# Altium PCB converter.PcbDoc (part 1 of 2)
Units mm, origin at the board's own origin, x right, y up, seen from the top; angles counter-clockwise.
Board outline 152.4 x 101.6 mm, 2 copper layers (Top Layer, Bottom Layer); 107 components, 95 nets, 363 pads, 0 vias.
Unrouted connection lines stored in the file: 249.
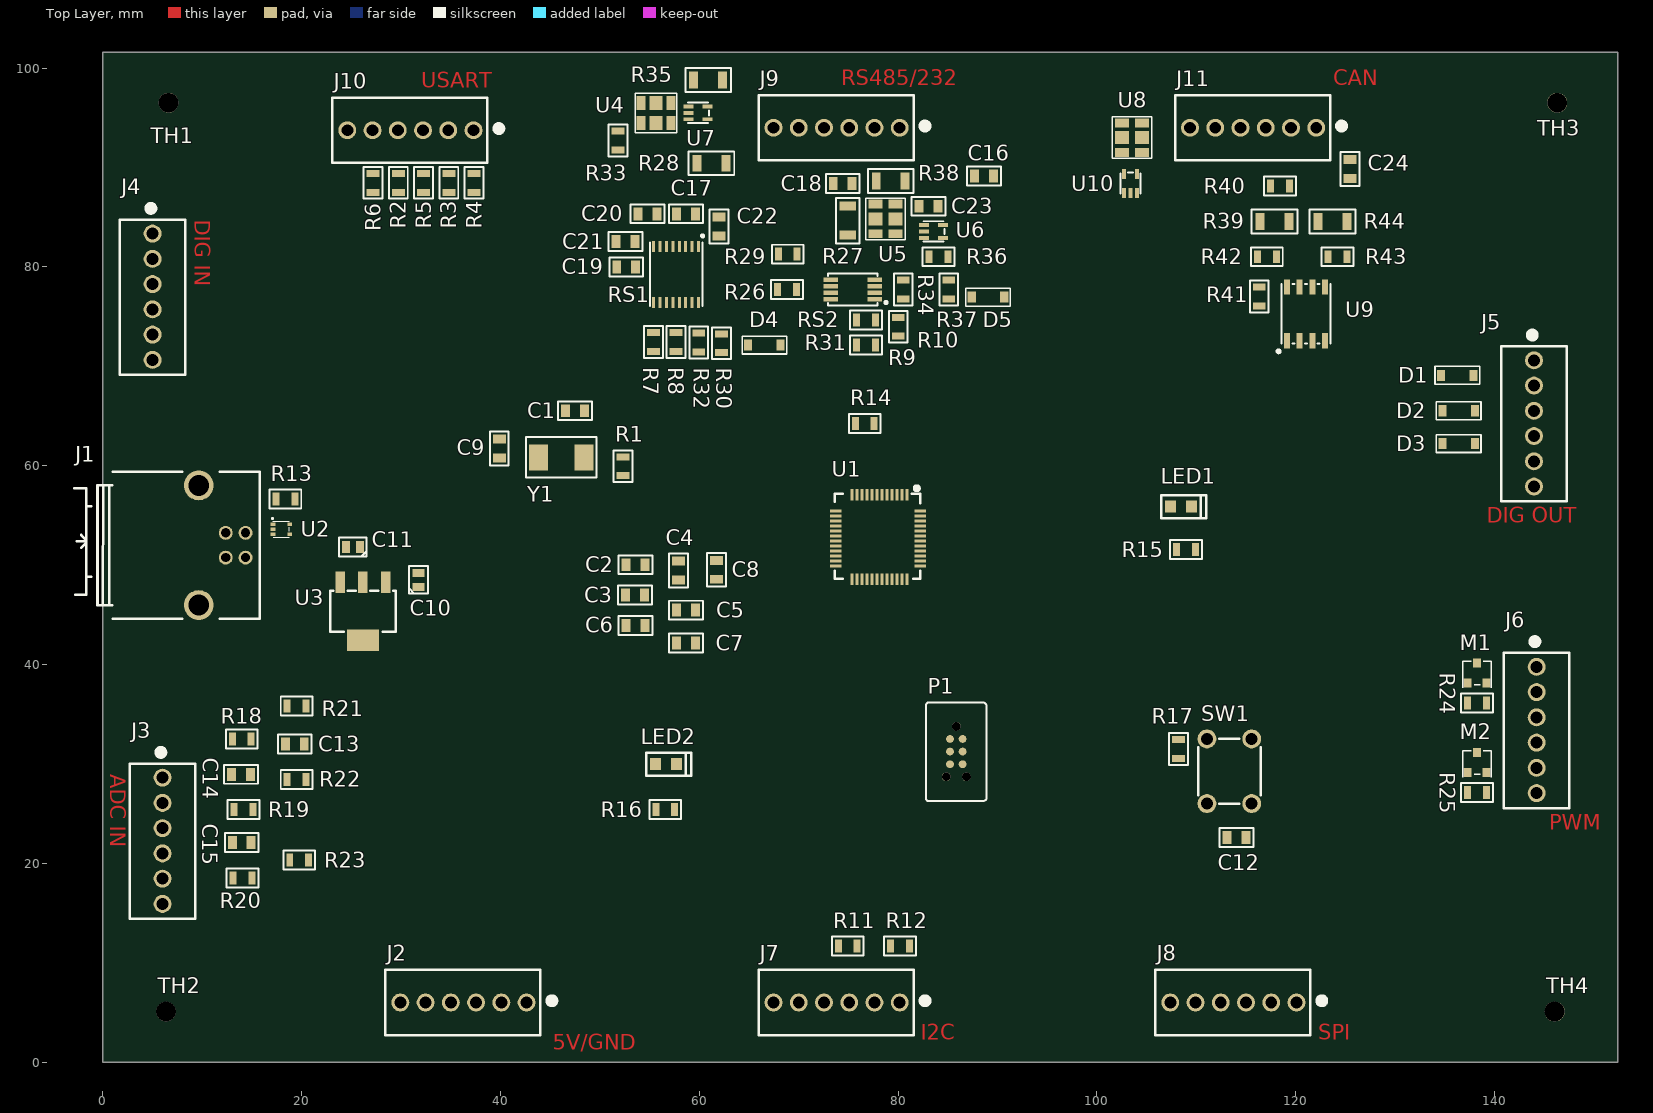
[diagram p0: Top Layer view]
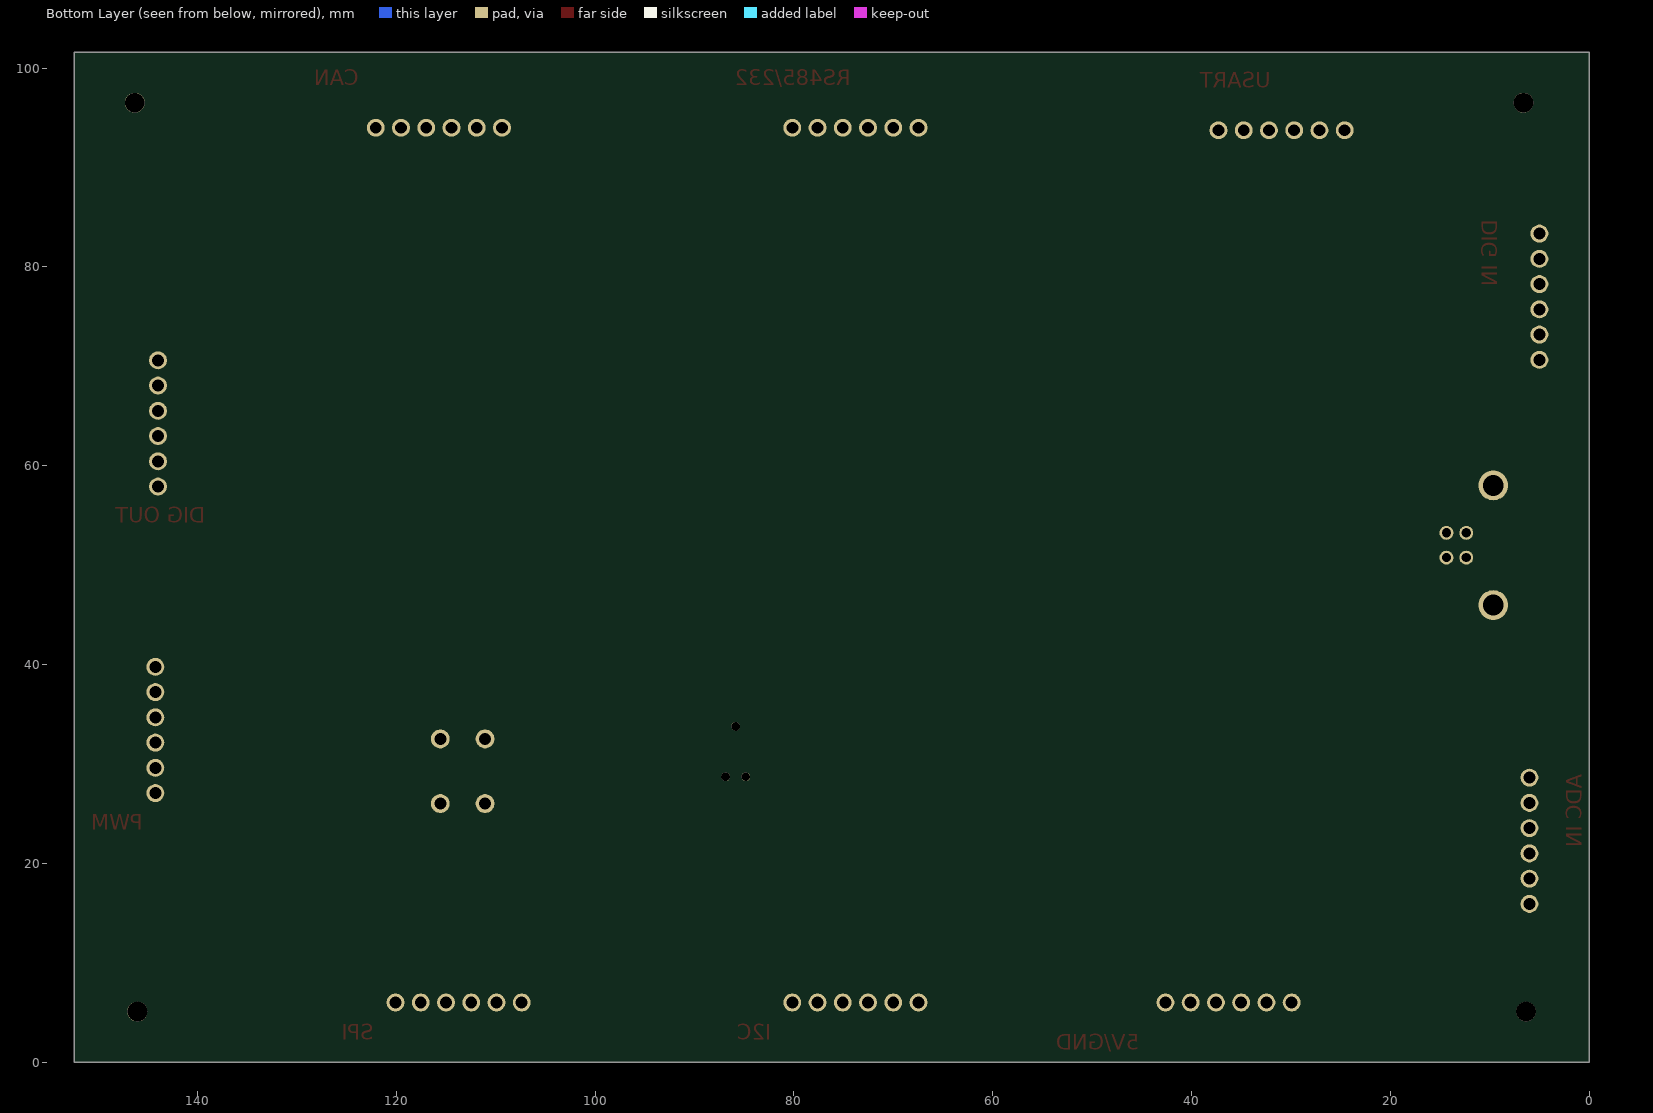
[diagram p1: Bottom Layer view, seen from below]

## Layer stack, top to bottom
Top Solder: solder mask 0.0102, Solder Resist, Dk 3.5
Top Layer: signal copper 0.0356
Dielectric 1: dielectric 0.32, FR-4, Dk 4.8
Bottom Layer: signal copper 0.0356
Bottom Solder: solder mask 0.0102, Solder Resist, Dk 3.5

## Board outline
0,0 152.4,0 152.4,101.6 0,101.6

## Design rules (kind name [scope] priority, off if disabled: settings)
Clearance [All] p1: gap=0.254 ignorepadtopadclearanceinfootprint=FALSE except(0: Arc-Hole Track-Hole SMDPad-Hole THPad-Hole Via-Hole Fill-Hole Poly-Hole Region-Hole Text-Hole)
DiffPairsRouting [All] p1: maxlimit=0.254 minlimit=0.254 mostfreqgap=0.254 toplayer_minwidth=0.381 toplayer_maxwidth=0.381 toplayer_prefwidth=0.381 bottomlayer_minwidth=0.381 bottomlayer_maxwidth=0.381 bottomlayer_prefwidth=0.381 maxuncoupledlength=12.7
PolygonConnect [All] p1: connectstyle=Relief reliefconductorwidth=0.254 reliefentries=4 polygonreliefangle="90 Angle" airgapwidth=0.254
RoutingVias [All] p1: holewidth=0.711 width=1.27 viastyle="Through Hole" minholewidth=0.711 minwidth=1.27 maxholewidth=0.711 maxwidth=1.27
SolderMaskExpansion [All] p1: expansion=0.102 istentingtop=FALSE
Width [All] p1: maxlimit=0.254 minlimit=0.254 preferedwidth=0.254
29 further rules are at their usual default settings.

## Classes and differential pairs
differential pair class USB_D_LINES: USB_D
differential pair class RS485_TVS_LINES: RS485 RS485_TVS UART485
differential pair class RS485_LINES: RS485 RS485_TVS UART485
differential pair class CAN_TVS_LINES: CAN CAN_TVS
differential pair class CAN_LINES: CAN CAN_TVS
net class USB: USB_D_N USB_D_P
net class RS485: RS485_N RS485_P RS485_TVS_N RS485_TVS_P UART485_N UART485_P
net class CAN: CAN_N CAN_P CAN_TVS_N CAN_TVS_P
differential pair USB_D: +USB_D_P -USB_D_N
differential pair UART485: +UART485_P -UART485_N
differential pair RS485: +RS485_P -RS485_N
differential pair RS485_TVS: +RS485_TVS_P -RS485_TVS_N
differential pair CAN: +CAN_P -CAN_N
differential pair CAN_TVS: +CAN_TVS_P -CAN_TVS_N

## Components (designator, comment, footprint, x,y, rotation, side; value= is the part's Value field where it differs from the comment)
C1 "20 pF / 10V" C0805 47.498,65.532 r180 top
C2 "1uF / 10V" C0805 53.594,50.038 r180 top
C3 "10 nF / 50V" C0805 53.528,46.99 r180 top
C4 "0.1uF / 25V" C0805 57.912,49.464 r90 top
C5 "0.1uF / 25V" C0805 58.674,45.466 r0 top
C6 "0.1uF / 25V" C0805 53.594,43.942 r180 top
C7 "0.1uF / 25V" C0805 58.674,42.164 r180 top
C8 "4.7uF / 16V" C0805 61.722,49.53 r90 top
C9 "20 pF / 10V" C0805 39.878,61.722 r90 top
C10 "10uF / 16V" CT0805 31.75,48.514 r90 top
C11 "10uF / 16V" CT0805 25.146,51.816 r180 top
C12 "0.1uF / 25V" C0805 114.046,22.606 r180 top
C13 "10 nF / 50V" C0805 19.304,32.004 r180 top
C14 "10 nF / 50V" C0805 13.904,28.956 r0 top
C15 "10 nF / 50V" C0805 13.97,22.098 r0 top
C16 "0.1uF / 25V" C0805 88.646,89.154 r0 top
C17 "0.1uF / 25V" C0805 58.674,85.344 r0 top
C18 "2.2nF / 250V" C0805 74.422,88.392 r0 top
C19 "0.1uF / 25V" C0805 52.644,80.01 r180 top
C20 "0.1uF / 25V" C0805 54.798,85.344 r0 top
C21 "0.1uF / 25V" C0805 52.578,82.55 r180 top
C22 "0.1uF / 25V" C0805 61.976,84.074 r90 top
C23 "2.2nF / 250V" C0805 83.058,86.106 r0 top
C24 "0.1uF / 25V" C0805 125.476,89.85 r90 top
D1 "BAT54GWJ" SOD123 136.255,69.088 r180 top
D2 "BAT54GWJ" SOD123 136.398,65.532 r180 top
D3 "BAT54GWJ" SOD123 136.398,62.23 r180 top
D4 "BAT54GWJ" SOD123 66.548,72.136 r180 top
D5 "BAT54GWJ" SOD123 89.043,76.962 r180 top
J1 "UE27BC54130" UE27BC54130 12,52 r270 top
J2 "SCREW" SCREW-6P 36.27,6 r180 top
J3 "SCREW" SCREW-6P 6,22.27 r270 top
J4 "SCREW" SCREW-6P 5,77 r270 top
J5 "SCREW" SCREW-6P 143.968,64.254 r270 top
J6 "SCREW" SCREW-6P 144.238,33.414 r270 top
J7 "SCREW" SCREW-6P 73.81,6 r180 top
J8 "SCREW" SCREW-6P 113.73,6 r180 top
J9 "SCREW" SCREW-6P 73.81,94 r180 top
J10 "SCREW" SCREW-6P 30.936,93.746 r180 top
J11 "SCREW" SCREW-6P 115.714,94 r180 top
LED1 "GREEN" LED_0805 108.458,55.88 r180 top
LED2 "GREEN" LED_0805 56.642,29.972 r180 top
M1 "DMG2302UK-7" SOT23 138.238,39.144 r0 top
M2 "DMG2302UK-7" SOT23 138.238,30.144 r0 top
P1 "TC2030-CTX-NL" TC2030-CTX-NL 85.852,31.242 r270 top
R1 "1k" R0805 52.324,59.944 r90 top
R2 "22R" R0805 29.718,88.458 r90 top
R3 "22R" R0805 34.798,88.458 r90 top
R4 "22R" R0805 37.338,88.458 r90 top
R5 "22R" R0805 32.258,88.458 r270 top
R6 "22R" R0805 27.178,88.458 r270 top
R7 "22R" R0805 55.372,72.456 r90 top
R8 "22R" R0805 57.658,72.456 r90 top
R9 "22R" R0805 76.774,72.136 r180 top
R10 "22R" R0805 80.01,73.98 r270 top
R11 "4K7" R0805 74.93,11.684 r0 top
R12 "4K7" R0805 80.198,11.684 r180 top
R13 "1K5" R0805 18.354,56.642 r180 top
R14 "10K" R0805 76.642,64.262 r0 top
R15 "120R" R0805 108.966,51.562 r180 top
R16 "180R" R0805 56.576,25.4 r180 top
R17 "10K" R0805 108.204,31.496 r270 top
R18 "1M" R0805 13.97,32.512 r180 top
R19 "1M" R0805 14.158,25.4 r180 top
R20 "1M" R0805 14.036,18.542 r180 top
R21 "100K" R0805 19.492,35.814 r180 top
R22 "100K" R0805 19.492,28.448 r180 top
R23 "100K" R0805 19.746,20.32 r180 top
R24 "1k" R0805 138.238,36.144 r0 top
R25 "1k" R0805 138.238,27.144 r0 top
R26 "4K7" R0805 68.834,77.724 r180 top
R27 "0R" R1206 74.93,84.656 r270 top
R28 "0R" R1206 61.214,90.424 r180 top
R29 "330R" R0805 68.9,81.28 r180 top
R30 "10K" R0805 62.23,72.324 r270 top
R31 "10K" R0805 76.774,74.676 r180 top
R32 "330R" R0805 59.944,72.39 r270 top
R33 "330R" R0805 51.816,92.71 r90 top
R34 "10K" R0805 80.518,77.724 r90 top
R35 "0R" R1206 60.886,98.806 r180 top
R36 "330R" R0805 84.074,81.026 r180 top
R37 "4K7" R0805 85.09,77.724 r90 top
R38 "0R" R1206 79.248,88.646 r180 top
R39 "0R" R1206 117.856,84.582 r0 top
R40 "120R" R0805 118.43,88.138 r180 top
R41 "10K" R0805 116.332,77.028 r90 top
R42 "33R" R0805 117.094,81.026 r180 top
R43 "33R" R0805 124.206,81.026 r0 top
R44 "0R" R1206 123.698,84.582 r180 top
RS1 "ICL3221EIVZ-T" ICL3221E 57.658,79.248 r270 top
RS2 "SN65HVD72DGKR" RS485T 75.438,77.724 r180 top
SW1 "PTS645SH50SMTR92LFS" PTS645SH50SMTR92-LFS 113.32,29.262 r270 top
TH1 "Tooling Hole" "TOOLING HOLE" 6.604,96.52 r0 top
TH2 "Tooling Hole" "TOOLING HOLE" 6.35,5.08 r0 top
TH3 "Tooling Hole" "TOOLING HOLE" 146.304,96.52 r0 top
TH4 "Tooling Hole" "TOOLING HOLE" 146.05,5.08 r0 top
U1 "STM32F103CBT6" STM32F103CBT6 77.978,52.832 r270 top
U2 "D5V0L4B5V-7" D5V0L4B5V-7 17.096,54.102 r270 top
U3 "LM1117IMP-3.3/NOPB" LM1117 26.162,45.36 r180 top
U4 "P40-G240-WH" "TBU - P40-G240-WH" 55.65,95.488 r0 top
U5 "P40-G240-WH" "TBU - P40-G240-WH" 78.74,84.836 r90 top
U6 "SP1002-02JTG" SC705 83.566,83.566 r270 top
U7 "SP1002-02JTG" SC705 59.878,95.504 r270 top
U8 "P40-G240-WH" "TBU - P40-G240-WH" 103.524,93 r90 top
U9 "SN65HVD231QDRQ1" SN65HVD231QDRQ1 121.031,75.278 r90 top
U10 "SP1002-02JTG" SC705 103.378,88.392 r0 top
Y1 "XTAL_8MHZ" ABM7-8.000MHZ-D2Y-T 46.108,60.84 r0 top

## Footprints (in the part's own frame and the unit in brackets; to place one, negate y for a bottom-side part, rotate by r counter-clockwise, add the part's x,y. Pads: shape width x height; smd on the part's side, far side on the other; paste and mask are expansions set on the pad)
ABM7-8.000MHZ-D2Y-T [mm]
  rect 1.9x2.6 smd: 1(-2.286,0) 2(2.286,0)
  silkscreen extent -3.56,-2.03 3.56,2.03, body extent -3,-1.75 3,1.75, height 1.45
C0805 [mm]
  rect 0.9x1.3 smd: 1(-0.95,0) 2(0.95,0)
  silkscreen extent -1.7,-0.95 1.7,0.95, body extent -1,-0.62 1,0.63, height 1
CT0805 [mm]
  rect 0.813x1.219 smd: 1(-0.7,0) 2(0.7,0)
  silkscreen extent -1.37,-0.95 1.37,0.95, body extent -1.13,-0.77 1.13,0.78, height 1.24
D5V0L4B5V-7 [mm]
  rect 0.375x0.5 smd mask+0.04: 1(0,0) 2(0.5,0) 3(1,0) 4(1,1.7) 5(0,1.7)
  silkscreen extent -0.64,-0.08 1.32,1.65, body extent -0.3,0.05 1.3,1.65, height 0.51
ICL3221E [mm]
  rect 1.1x0.3 smd: 1(-2.825,2.275) 2(-2.825,1.625) 3(-2.825,0.975) 4(-2.825,0.325) 5(-2.825,-0.325) 6(-2.825,-0.975) 7(-2.825,-1.625) 8(-2.825,-2.275) 9(2.825,-2.275) 10(2.825,-1.625) 11(2.825,-0.975) 12(2.825,-0.325) 13(2.825,0.325) 14(2.825,0.975) 15(2.825,1.625) 16(2.825,2.275)
  silkscreen extent -3.92,-2.64 3.2,2.72, body extent -3.21,-2.5 3.19,2.5, height 1.2
LED_0805 [mm]
  rect 1.1x1.2 smd: 1(-1.05,0) 2(1.05,0)
  silkscreen extent -2.53,-1.16 2,1.16, body extent -1,-0.62 1,0.63, height 0.7
LM1117 [mm]
  rect 0.95x2.15 smd: 1(-2.3,-2.9) 2(0,-2.9) 3(2.3,-2.9)
  rect 3.25x2.15 smd: 2(0,2.9)
  silkscreen extent -3.3,-2.08 3.3,2.06, body extent -3.25,-3.6 3.25,3.4, height 1.8
PTS645SH50SMTR92-LFS [mm]
  round 1.9 hole 1.2: 1(-3.25,2.25) 2(3.25,2.25) 3(-3.25,-2.25) 4(3.25,-2.25)
  silkscreen extent -3.25,-3.15 3.25,3.15, body extent -4.5,-3 4.5,3, height 4.01
R0805 [mm]
  rect 0.7x1.3 smd: 1(-0.95,0) 2(0.95,0)
  silkscreen extent -1.6,-0.95 1.6,0.95, body extent -1,-0.6 1,0.6, height 0.61
R1206 [mm]
  rect 0.9x1.7 smd: 1(-1.45,0) 2(1.45,0)
  silkscreen extent -2.3,-1.2 2.3,1.2, body extent -1.6,-0.8 1.6,0.8, height 0.56
RS485T [mm]
  rect 1.45x0.45 smd mask+0.05: 1(-2.2,0.975) 2(-2.2,0.325) 3(-2.2,-0.325) 4(-2.2,-0.975) 5(2.2,-0.975) 6(2.2,-0.325) 7(2.2,0.325) 8(2.2,0.975)
  silkscreen extent -3.39,-1.6 2.5,1.6, body extent -2.45,-1.49 2.45,1.51, height 1.1
SC705 [mm]
  rect 0.4x1 smd mask+0.05: 1(-0.65,-0.95) 2(0,-0.95) 3(0.65,-0.95) 4(0.65,0.95) 5(-0.65,0.95)
  silkscreen extent -1.03,-1 1.03,1.1, body extent -1.03,-1.1 1.02,1.1, height 1.1
SCREW-6P [mm]
  round 1.8 hole 1.2: 1(-6.35,0) 2(-3.81,0) 3(-1.27,0) 4(1.27,0) 5(3.81,0) 6(6.35,0)
  silkscreen extent -9.19,-3.29 7.85,3.29, body extent -7.79,-3.24 7.91,3.26, height 10.01
SN65HVD231QDRQ1 [mm]
  rect 1.55x0.6 smd mask+0.107: 1(-2.7,1.905) 2(-2.7,0.635) 3(-2.7,-0.635) 4(-2.7,-1.905) 5(2.7,-1.905) 6(2.7,-0.635) 7(2.7,0.635) 8(2.7,1.905)
  silkscreen extent -3.92,-2.45 3,2.91, body extent -3,-2.45 3,2.45, height 1.75
SOD123 [mm]
  rect 0.81x1.12 smd: 1(-1.635,0) 2(1.635,0)
  silkscreen extent -2.24,-0.9 2.24,0.9, body extent -1.51,-0.96 1.49,0.92, height 1.25
SOT23 [mm]
  rect 0.8x0.9 smd: 1(-0.95,-1) 2(0.95,-1) 3(0,1)
  silkscreen extent -1.45,-1.5 1.45,1.2, body extent -1.45,-1.2 1.45,1.2, height 1.1
STM32F103CBT6 [mm]
  rect 1.2x0.3 smd mask+0.051: 1(-4.25,2.9) 2(-4.25,2.4) 3(-4.25,1.9) 4(-4.25,1.4) 5(-4.25,0.9) 6(-4.25,0.4) 7(-4.25,-0.1) 8(-4.25,-0.6) 9(-4.25,-1.1) 10(-4.25,-1.6) 11(-4.25,-2.1) 12(-4.25,-2.6) 25(4.25,-2.6) 26(4.25,-2.1) 27(4.25,-1.6) 28(4.25,-1.1) 29(4.25,-0.6) 30(4.25,-0.1) 31(4.25,0.4) 32(4.25,0.9) 33(4.25,1.4) 34(4.25,1.9) 35(4.25,2.4) 36(4.25,2.9)
  rect 0.3x1.2 smd mask+0.051: 13(-2.6,-4.25) 14(-2.1,-4.25) 15(-1.6,-4.25) 16(-1.1,-4.25) 17(-0.6,-4.25) 18(-0.1,-4.25) 19(0.4,-4.25) 20(0.9,-4.25) 21(1.4,-4.25) 22(1.9,-4.25) 23(2.4,-4.25) 24(2.9,-4.25) 37(2.9,4.25) 38(2.4,4.25) 39(1.9,4.25) 40(1.4,4.25) 41(0.9,4.25) 42(0.4,4.25) 43(-0.1,4.25) 44(-0.6,4.25) 45(-1.1,4.25) 46(-1.6,4.25) 47(-2.1,4.25) 48(-2.6,4.25)
  silkscreen extent -5.1,-4.37 4.2,4.26, body extent -4.35,-4.35 4.65,4.65, height 1.6
"TBU - P40-G240-WH" [mm]
  rect 1.3x1.4 smd mask+0.06: 1(0,1) 2(0,-1)
  rect 0.9x1.4 smd mask+0.06: 3(-1.5,1) 4(1.5,1) 5(1.5,-1) 6(-1.5,-1)
  silkscreen extent -2.09,-2 2.09,2, body extent -2,-2 2,2, height 0.89
TC2030-CTX-NL [mil]
  round 31 smd paste-19.68: 1(-50,-25) 2(-50,25) 3(0,-25) 4(0,25) 5(50,-25) 6(50,25)
  round 34 hole 35 unplated: A(-100,0) B(100,40) C(100,-40)
  silkscreen extent -195,-120 195,120
"TOOLING HOLE" [mm]
  round 2 hole 2 unplated: 1(0,0)
UE27BC54130 [mm]
  round 1.4 hole 0.92: 1(1.25,2.355) 2(-1.25,2.355) 3(-1.25,0.355) 4(1.25,0.355)
  round 3 hole 2.1: 5(6.02,-2.355) 6(-6.02,-2.355)
  silkscreen extent -7.4,-14.89 7.4,3.76, body extent -7.5,-12.63 7.4,3.87, height 11.1

## Part data
C1 C9: library part C0805C200G8HAC7800, "MLCC - 20pF 10V 0805 X8R +/- 2%", Manufacturer=KEMET, Supplier Part Number 1=399-C0805C200G8HAC7800CT-ND, Manufacturer Part Number=C0805C200G8HAC7800, Pricing 1="1=0,18000, 10=0,12800, 50=0,07240, 100=0,06000, 500=0,04208, 1000=0,03484 (USD)", RoHS=No, Stock 1=11310, Supplier 1=Digi-Key
C2: library part LMF212B7105KGHT, "MLCC - 1uF 10V 0805   X7R +/- 10%", Manufacturer="Taiyo Yuden", Supplier Part Number 1=587-6522-1-ND, Manufacturer Part Number=LMF212B7105KGHT, Pricing 1="1=0.31000, 10=0.21100, 50=0.14040, 100=0.11930, 500=0.08422, 1000=0.07369 (USD)", RoHS=Yes, RoHS Compliant=Yes, Stock 1=5962, Supplier 1=Digi-Key
C3 C13 C14 C15: library part C0805C103J5GEC7800, "MLCC - 10nF 50V 0805 C0G +/- 5%", Manufacturer=KEMET, Supplier Part Number 1=399-C0805C103J5GEC7800CT-ND, Manufacturer Part Number=C0805C103J5GEC7800, Pricing 1="1=0.31000, 10=0.21500, 50=0.14300, 100=0.12160, 500=0.08584, 1000=0.07511 (USD)", RoHS=No, Stock 1=1119, Supplier 1=Digi-Key
C4 C5 C6 C7 C12 C16 C17 C19 C20 C21 C22 C24: library part CC0805KRX7R8BB104, "MLCC - 0.1uF 25V 0805 X7R +/- 10%", Capacitance=100nF, Case Code (Imperial)=0805, Case Code (Metric)=2012, Dielectric=X7R, Insulation Resistance=100GR, Manufacturer=Yageo, Max Operating Temperature=125°C, Min Operating Temperature=-55°C, Package Quantity=1, Resistor Type=Ceramic, Supplier Part Number 1=311-1141-1-ND, Tolerance=10%, Voltage Rating=25V, Case/Package=0805, Category="Ceramic Capacitors", ComponentLink1Description=https://datasheet.ciiva.com/145/mlccorderingcode-145007.pdf?src-supplier=Digi-Key, ComponentLink1URL=https://datasheet.ciiva.com/145/mlccorderingcode-145007.pdf?src-supplier=Digi-Key, ComponentLink2Description=https://datasheet.ciiva.com/145/mlccorderingcode-145008.pdf?src-supplier=Digi-Key, ComponentLink2URL=https://datasheet.ciiva.com/145/mlccorderingcode-145008.pdf?src-supplier=Digi-Key, ComponentLink3Description=https://datasheet.ciiva.com/145/mlccorderingcode-145009.pdf?src-supplier=Digi-Key, ComponentLink3URL=https://datasheet.ciiva.com/145/mlccorderingcode-145009.pdf?src-supplier=Digi-Key, ComponentLink4Description=https://datasheet.ciiva.com/8034/1784427-8034029.pdf?src-supplier=Element14, ComponentLink4URL=https://datasheet.ciiva.com/8034/1784427-8034029.pdf?src-supplier=Element14, ComponentLink5Description=https://datasheet.ciiva.com/8034/1784427-8034030.pdf?src-supplier=Element14, ComponentLink5URL=https://datasheet.ciiva.com/8034/1784427-8034030.pdf?src-supplier=Element14, ComponentLink6Description=https://datasheet.ciiva.com/8034/70765-8034031.pdf?src-supplier=Element14, ComponentLink6URL=https://datasheet.ciiva.com/8034/70765-8034031.pdf?src-supplier=Element14, ComponentLink7Description=https://datasheet.ciiva.com/46430/1850775-46430166.pdf?src-supplier=Element14, ComponentLink7URL=https://datasheet.ciiva.com/46430/1850775-46430166.pdf?src-supplier=Element14, ComponentLink8Description=https://datasheet.ciiva.com/28450/1489800-28450789.pdf?src-supplier=Element14, ComponentLink8URL=https://datasheet.ciiva.com/28450/1489800-28450789.pdf?src-supplier=Element14, ComponentLink9Description=https://datasheet.ciiva.com/15189/getdatasheetpartid-330244-15189223.pdf?src-supplier=Verical, ComponentLink9URL=https://datasheet.ciiva.com/15189/getdatasheetpartid-330244-15189223.pdf?src-supplier=Verical, ComponentLink10Description=https://datasheet.ciiva.com/16625/upy-gphc-x7r-6-3v-to-50v-8-16625546.pdf?src-supplier=Avnet+Europe, ComponentLink10URL=https://datasheet.ciiva.com/16625/upy-gphc-x7r-6-3v-to-50v-8-16625546.pdf?src-supplier=Avnet+Europe, Depth=1.25mm, Halogen Free="Halogen Free", Height=0.85mm, Lead Free="Lead Free", Length=2mm, Manufacturer Part Number=CC0805KRX7R8BB104, Material=Ceramic, Mount="Surface Mount", Number of Pins=2, Packaging="Tape and Reel", Pricing 1="1=0,12000, 10=0,08800, 50=0,04980, 100=0,04130, 500=0,02894, 1000=0,02396 (USD)", Radiation Hardening=No, REACH SVHC="No SVHC", RoHS=Yes, RoHS Compliant=Yes, Series=CC, Stock 1=331734, Supplier 1=Digi-Key, Termination=SMD/SMT, Thickness=0.033inch, Voltage Rating (DC)=25V, Width=0.049inch
C8: library part GCM21BR71C475KA73L, "MLCC - 4.7uF 16V 0805 X7R +/- 10%", Capacitance=4.7uF, Case Code (Imperial)=0805, Case Code (Metric)=2012, Dielectric=X7R, Manufacturer=Murata, Max Operating Temperature=125°C, Min Operating Temperature=-55°C, Package Quantity=1, Ratings=AEC-Q200, Supplier Part Number 1=490-5332-1-ND, Tolerance=10%, Voltage=16V, Case/Package=0805, Category="Ceramic Capacitors", ComponentLink1Description=https://datasheet.ciiva.com/11613/product-11613410.pdf?src-supplier=Avnet, ComponentLink1URL=https://datasheet.ciiva.com/11613/product-11613410.pdf?src-supplier=Avnet, ComponentLink2Description=https://datasheet.ciiva.com/11787/0900766b80ef92d0-11787002.pdf?src-supplier=RSComponents, ComponentLink2URL=https://datasheet.ciiva.com/11787/0900766b80ef92d0-11787002.pdf?src-supplier=RSComponents, ComponentLink3Description=https://datasheet.ciiva.com/140/s0717e-140483.pdf?src-supplier=Digi-Key, ComponentLink3URL=https://datasheet.ciiva.com/140/s0717e-140483.pdf?src-supplier=Digi-Key, ComponentLink4Description=https://datasheet.ciiva.com/140/s0717e-140484.pdf?src-supplier=Digi-Key, ComponentLink4URL=https://datasheet.ciiva.com/140/s0717e-140484.pdf?src-supplier=Digi-Key, Construction=Flat, Depth=1.25mm, Height=1.25mm, Lead Free="Lead Free", Length=2mm, Manufacturer Part Number=GCM21BR71C475KA73L, Mount="Surface Mount", Packaging="Tape and Reel", Pricing 1="1=0,37000, 10=0,25300, 50=0,16900, 100=0,14360, 500=0,10138, 1000=0,08870 (USD)", Radiation Hardening=No, REACH SVHC="No SVHC", RoHS=Yes, RoHS Compliant=Yes, Series=GCM, Stock 1=262759, Supplier 1=Digi-Key, Termination=SMD/SMT, Thickness=0.055inch, Voltage Rating=16V, Voltage Rating (DC)=16V, Weight=0.000335oz, Width=0.049inch
C10 C11: library part TCTP1C106M8R, "TAL CAP - 10UF 16V 0805 +/- 20%", Capacitance=10uF, Case Code (Imperial)=0805, Case Code (Metric)=2012, ESR (Equivalent Series Resistance)=6R, Manufacturer=Rohm, Max Operating Temperature=125°C, Min Operating Temperature=-55°C, Package Quantity=3000, Supplier Part Number 1=511-1683-1-ND, Tolerance=20%, Voltage=16V, Case/Package=0805, Category="Tantalum Capacitors", ComponentLink1Description=https://datasheet.ciiva.com/259/tct-p-259243.pdf?src-supplier=Digi-Key, ComponentLink1URL=https://datasheet.ciiva.com/259/tct-p-259243.pdf?src-supplier=Digi-Key, ComponentLink2Description=https://datasheet.ciiva.com/259/tct-p-259244.pdf?src-supplier=Digi-Key, ComponentLink2URL=https://datasheet.ciiva.com/259/tct-p-259244.pdf?src-supplier=Digi-Key, ComponentLink3Description=https://datasheet.ciiva.com/259/tct-p-259245.pdf?src-supplier=Digi-Key, ComponentLink3URL=https://datasheet.ciiva.com/259/tct-p-259245.pdf?src-supplier=Digi-Key, Features="General Purpose", Height - Seated (Max)=0.047inch, Lead Free="Lead Free", Length=0.079inch, Manufacturer Part Number=TCTP1C106M8R, Mount="Surface Mount", Packaging="Tape and Reel", Pricing 1="1=0,86000, 10=0,63300, 50=0,50640, 100=0,43400, 500=0,34360, 1000=0,28934 (USD)", RoHS=Yes, RoHS Compliant=Yes, Series=TCT, Stock 1=134422, Supplier 1=Digi-Key, Voltage Rating=16V, Width=0.049inch
C18 C23: library part C0805C222KAGECAUTO, "MLCC - 2.2 nF 250V 0805  C0G +/- 10%", Manufacturer=KEMET, Supplier Part Number 1=399-17905-1-ND, Category="Ceramic Capacitors", ComponentLink1Description=https://api.kemet.com/component-edge/download/datasheet/C0805C222KAGECAUTO.pdf?src-supplier=Digi-Key, ComponentLink1URL=https://api.kemet.com/component-edge/download/datasheet/C0805C222KAGECAUTO.pdf?src-supplier=Digi-Key, Manufacturer Part Number=C0805C222KAGECAUTO, Pricing 1="1=0,26000, 10=0,17800, 50=0,11880, 100=0,10100, 500=0,07128, 1000=0,06237 (USD)", RoHS=Yes, RoHS Compliant=Yes, Stock 1=14146, Supplier 1=Digi-Key
D1 D2 D3 D4 D5: "DIODE SCHOTTKY 30 V - 200 mA SOD123", Average Rectified Current=200mA, Manufacturer="Nexperia USA", Max Operating Temperature=85°C, Max Reverse Voltage (DC)=30V, Min Operating Temperature=-40°C, Supplier Part Number 1=73AH9681, ComponentLink1Description=https://assets.nexperia.com/documents/data-sheet/BAT54GW.pdf?src-supplier=Digi-Key, ComponentLink1URL=https://assets.nexperia.com/documents/data-sheet/BAT54GW.pdf?src-supplier=Digi-Key, Manufacturer Part Number=BAT54GWJ, Mount="Surface Mount", Packaging="Cut Tape", RoHS=No, Supplier 1=Newark
J1: "CONN USB RECPT B 2.0", Color=Black, Insulation Resistance=1GR, Manufacturer="Amphenol Commercial", Package Quantity=3000, Supplier Part Number 1=UE27BC54130-ND, Category="RF / Coaxial Connectors", ComponentLink1Description=https://datasheet.ciiva.com/851/ue27bcx4xxx-851809.pdf?src-supplier=Digi-Key, ComponentLink1URL=https://datasheet.ciiva.com/851/ue27bcx4xxx-851809.pdf?src-supplier=Digi-Key, ComponentLink2Description=https://datasheet.ciiva.com/10945/ue27bcx4xxx-10945210.pdf?src-supplier=Avnet, ComponentLink2URL=https://datasheet.ciiva.com/10945/ue27bcx4xxx-10945210.pdf?src-supplier=Avnet, ComponentLink3Description=https://datasheet.ciiva.com/16668/ue27bcx4xxx-16668218.pdf?src-supplier=Avnet+Europe, ComponentLink3URL=https://datasheet.ciiva.com/16668/ue27bcx4xxx-16668218.pdf?src-supplier=Avnet+Europe, Connector Type=USB, Contact Material=Bronze, Contact Plating=Gold, Depth=16.3mm, Gender=Receptacle, Housing Material=Polybutylene, Length=12.04mm, Manufacturer Part Number=UE27BC54130, Mount="Through Hole,Horizontal", Number of Contacts=4, Number of Ports=1, Number of Terminals/Pins=4, Orientation="Right Angle", Packaging=Bulk, Pitch=2.5mm, Pricing 1="1=1,15000, 10=1,01500, 25=0,95560, 40=0,91575, 120=0,87592, 240=0,79633, 480=0,71669, 960=0,63705, 2400=0,57733 (USD)", Radiation Hardening=No, RoHS=Yes, Series=UE27, Stock 1=8145, Supplier 1=Digi-Key, Termination=Solder
J2 J3 J4 J5 J6 J7 J8 J9 J10 J11: library part 282834-6, "TERM BLK 6P SIDE 2.54MM", Color=Green, Current=10A, Flammability Rating="UL94 V-0", Manufacturer="TE Connectivity", Max Operating Temperature=105°C, Max Supply Voltage (AC)=150V, Min Operating Temperature=-40°C, Package Quantity=100, Supplier Part Number 1=A98337-ND, Approvals=UL, Category="Terminal Blocks", Closed End="No (Without)", ComponentLink1Description=https://datasheet.ciiva.com/823/eng-cd-282834-c1-823488.pdf?src-supplier=Digi-Key, ComponentLink1URL=https://datasheet.ciiva.com/823/eng-cd-282834-c1-823488.pdf?src-supplier=Digi-Key, ComponentLink2Description=https://datasheet.ciiva.com/16308/282834-6-16308413.pdf?src-supplier=Future+Electronics, ComponentLink2URL=https://datasheet.ciiva.com/16308/282834-6-16308413.pdf?src-supplier=Future+Electronics, ComponentLink3Description=https://datasheet.ciiva.com/25618/0900766b810c7187-25618156.pdf?src-supplier=RSComponents, ComponentLink3URL=https://datasheet.ciiva.com/25618/0900766b810c7187-25618156.pdf?src-supplier=RSComponents, ComponentLink4Description=https://datasheet.ciiva.com/9370/eng-cs-1308389-eurostyle-terminal-blocks-0607-9370422.pdf?src-supplier=Avnet, ComponentLink4URL=https://datasheet.ciiva.com/9370/eng-cs-1308389-eurostyle-terminal-blocks-0607-9370422.pdf?src-supplier=Avnet, ComponentLink5Description=https://datasheet.ciiva.com/16676/eng-cs-1308389-eurostyle-terminal-blocks-0607-16676062.pdf?src-supplier=Avnet+Europe, ComponentLink5URL=https://datasheet.ciiva.com/16676/eng-cs-1308389-eurostyle-terminal-blocks-0607-16676062.pdf?src-supplier=Avnet+Europe, ComponentLink6Description=https://datasheet.ciiva.com/30097/eng-cs-1308389-eurostyle-terminal-blocks-0607-30097352.pdf?src-supplier=Onlinecomponents.com, ComponentLink6URL=https://datasheet.ciiva.com/30097/eng-cs-1308389-eurostyle-terminal-blocks-0607-30097352.pdf?src-supplier=Onlinecomponents.com, Connector Type=Receptacle, Contact Material=Brass, Contact Plating=Tin, Current Rating=10A, Depth=6.5mm, ELV=Compliant, Gender=Female, Housing Color=Green, Housing Material=Polyamide, Interlock="No (Without)", Lead Free="Lead Free", Length=15.7mm, Manufacturer Part Number=282834-6, Material=Nylon, Max Current Rating=10A, Max Voltage Rating (AC)=150V, Mount="Through Hole", Number of Circuits=6, Number of Contacts=6, Number of Levels=1, Number of Poles=6, Number of Positions=6, Number of Positions Per Level=6, Number of Rows=1, Orientation=Straight, Packaging=Box, Pitch=2.54mm, Plating=Brass,Steel, Pricing 1="1=5,33000, 10=4,06500, 25=3,80720, 50=3,38400, 100=3,31050, 250=3,05300, 500=2,75874, 1000=2,45221 (USD)", Radiation Hardening=No, REACH SVHC=Unknown, RoHS=Yes, Screw Flange="No (Without)", Screwless Terminal Block="Yes (With)", Series=Buchanan, Side Stackable="Yes (With)", Stock 1=7269, Supplier 1=Digi-Key, Tail Length=3.4mm, Termination=Solder, Thread Size=M1.6, Voltage=150V, Voltage Rating=150V, Width=6.5mm, Wire Gauge (Max)=30AWG, Wire Gauge (Min)=16AWG, Wire/Cable Gauge=30AWG
LED1: library part 7012X5, "SMD LED GREEN 2.1V 0805 20mA", Case Code (Imperial)=0805, Case Code (Metric)=2012, Color=Green, Forward Current=20mA, Forward Voltage=2.1V, Lens Color=Clear, Manufacturer="VCC CHML", Max Operating Temperature=85°C, Min Operating Temperature=-40°C, Package Quantity=1, Power Dissipation=62.5mW, Reverse Voltage=4V, Supplier Part Number 1=L61105CT-ND, Case/Package=0805, Category=LEDs, ComponentLink1Description=https://datasheet.ciiva.com/2114/1-26-2114592.pdf?src-supplier=Digi-Key, ComponentLink1URL=https://datasheet.ciiva.com/2114/1-26-2114592.pdf?src-supplier=Digi-Key, ComponentLink2Description=https://datasheet.ciiva.com/7639/726505-7639302.pdf?src-supplier=Element14, ComponentLink2URL=https://datasheet.ciiva.com/7639/726505-7639302.pdf?src-supplier=Element14, ComponentLink3Description=https://datasheet.ciiva.com/46391/726505-46391115.pdf?src-supplier=Element14, ComponentLink3URL=https://datasheet.ciiva.com/46391/726505-46391115.pdf?src-supplier=Element14, ComponentLink4Description=https://datasheet.ciiva.com/16214/7012xseriesbrightchipshighbrightnesssmtleds0805packagesize-16214285.pdf?src-supplier=Future+Electronics, ComponentLink4URL=https://datasheet.ciiva.com/16214/7012xseriesbrightchipshighbrightnesssmtleds0805packagesize-16214285.pdf?src-supplier=Future+Electronics, Depth=1.25mm, Height=1mm, Illumination Color=Green, Lead Free="Lead Free", Length=2mm, Lens Style=Diffused,Rectangular, Luminous Intensity=6.4mcd, Manufacturer Part Number=7012X5, Mount="Surface Mount", Number of Elements=1, Number of LEDs=1, Number of Pins=2, Packaging="Tape and Reel", Power Rating=62.5mW, Pricing 1="1=0,60000, 10=0,39600, 100=0,26210, 1000=0,20235, 2000=0,18285 (USD)", REACH SVHC=Unknown, Reverse Voltage (DC)=4V, RoHS=Yes, RoHS Compliant=Yes, Series=BrightChips™, Stock 1=153089, Supplier 1=Digi-Key, Test Current=20mA, Viewing Angle=120°, Wavelength=560nm, Width=1.25mm
LED2: library part 150080GS75000, "SMD LED GREEN 3.2V 0805 20mA", Case Code (Imperial)=0805, Case Code (Metric)=2012, Color=Green, Forward Current=30mA, Forward Voltage=3.2V, Manufacturer="Wurth Electronics", Max Operating Temperature=85°C, Min Operating Temperature=-40°C, Package Quantity=4000, Supplier Part Number 1=732-4983-1-ND, Test Current=20mA, Case/Package=0805, Category=LEDs, ComponentLink1Description=https://datasheet.ciiva.com/29563/150080gs75000-29563008.pdf?src-supplier=Digi-Key, ComponentLink1URL=https://datasheet.ciiva.com/29563/150080gs75000-29563008.pdf?src-supplier=Digi-Key, ComponentLink2Description=https://datasheet.ciiva.com/29279/759434-da-01-en-chipled-0805-w-kl-gruen-150080gs75000-29279039.pdf?src-supplier=Conrad, ComponentLink2URL=https://datasheet.ciiva.com/29279/759434-da-01-en-chipled-0805-w-kl-gruen-150080gs75000-29279039.pdf?src-supplier=Conrad, Dominant Wavelength=520nm, Height=0.7mm, Length=2mm, Lens Style=Clear,Rectangular, Luminous Intensity=450mcd, Manufacturer Part Number=150080GS75000, Mount="Surface Mount", Packaging="Cut Tape", Pricing 1="1=0,18000, 50=0,16500, 100=0,14200, 500=0,12300 (USD)", REACH SVHC=Unknown, RoHS=Yes, RoHS Compliant=Yes, Stock 1=102669, Supplier 1=Digi-Key, Viewing Angle=140°, Wavelength=520nm, Width=1.25mm
M1 M2: "MOSFET N-CHANNEL 20 V, 2.8 A, 0.061 OHM, SOT-23", Case/Package=TO-236-3, Continuous Drain Current (ID)=2.8A, Drain to Source Voltage (Vdss)=20V, Input Capacitance=130pF, Manufacturer=Diodes, Max Operating Temperature=150°C, Max Power Dissipation=660mW, Min Operating Temperature=-55°C, Supplier Part Number 1=DMG2302UK-7DICT-ND, Category=MOSFETs, ComponentLink1Description=http://www.farnell.com/datasheets/2814387.pdf?src-supplier=Farnell, ComponentLink1URL=http://www.farnell.com/datasheets/2814387.pdf?src-supplier=Farnell, ComponentLink2Description=https://www.diodes.com/assets/Datasheets/DMG2302UK.pdf?src-supplier=Digi-Key, ComponentLink2URL=https://www.diodes.com/assets/Datasheets/DMG2302UK.pdf?src-supplier=Digi-Key, ComponentLink3Description=http://www.farnell.com/datasheets/2814387.pdf?src-supplier=Element14, ComponentLink3URL=http://www.farnell.com/datasheets/2814387.pdf?src-supplier=Element14, ComponentLink4Description=http://www.farnell.com/datasheets/2814387.pdf?src-supplier=Newark, ComponentLink4URL=http://www.farnell.com/datasheets/2814387.pdf?src-supplier=Newark, Manufacturer Part Number=DMG2302UK-7, Mount="Surface Mount", Packaging="Tape and Reel", Pricing 1="1=0,37000, 10=0,27900, 100=0,15800, 500=0,10460, 1000=0,08020 (USD)", Rds On Max=90mR, RoHS=Yes, RoHS Compliant=Yes, Stock 1=678413, Supplier 1=Digi-Key
P1: "6 pin Tag-Connect", .PCBChecked="Alex Batista", .SCHChecked="Alex Batista"
R1 R24 R25: library part RC0805FR-071KL, "RES - 1K 1/8W 0805 1%", Case Code (Imperial)=0805, Case Code (Metric)=2012, Manufacturer=Yageo, Max Operating Temperature=155°C, Max Power Dissipation=125mW, Min Operating Temperature=-55°C, Package Quantity=1, Resistance=1kR, Resistance Tolerance=1%, Resistor Type="Thick Film", Supplier Part Number 1=311-1.00KCRCT-ND, Temperature Coefficient=100ppm/°C, Voltage Rating=150V, Case/Package=0805, Category="Chip SMD Resistors", ComponentLink1Description=https://datasheet.ciiva.com/46385/444164-46385020.pdf?src-supplier=Element14, ComponentLink1URL=https://datasheet.ciiva.com/46385/444164-46385020.pdf?src-supplier=Element14, ComponentLink2Description=https://datasheet.ciiva.com/2456/pyu-r-int-thick-7-2456975.pdf?src-supplier=Digi-Key, ComponentLink2URL=https://datasheet.ciiva.com/2456/pyu-r-int-thick-7-2456975.pdf?src-supplier=Digi-Key, ComponentLink3Description=https://datasheet.ciiva.com/2456/pyu-r-int-thick-7-2456976.pdf?src-supplier=Digi-Key, ComponentLink3URL=https://datasheet.ciiva.com/2456/pyu-r-int-thick-7-2456976.pdf?src-supplier=Digi-Key, ComponentLink4Description=https://datasheet.ciiva.com/2456/pyu-r-int-thick-7-2456977.pdf?src-supplier=Digi-Key, ComponentLink4URL=https://datasheet.ciiva.com/2456/pyu-r-int-thick-7-2456977.pdf?src-supplier=Digi-Key, ComponentLink5Description=https://datasheet.ciiva.com/16850/rc0805-16850409.pdf?src-supplier=Future+Electronics, ComponentLink5URL=https://datasheet.ciiva.com/16850/rc0805-16850409.pdf?src-supplier=Future+Electronics, ComponentLink6Description=https://datasheet.ciiva.com/7941/1686128-7941719.pdf?src-supplier=Element14, ComponentLink6URL=https://datasheet.ciiva.com/7941/1686128-7941719.pdf?src-supplier=Element14, Construction=Rectangular, Depth=1.25mm, Features="Moisture Resistant", Height=0.024inch, Lead Free="Lead Free", Length=0.079inch, Manufacturer Part Number=RC0805FR-071KL, Military Standard=Not, Number of Pins=2, Number of Terminations=2, Packaging="Tape and Reel", Power Rating=125mW, Pricing 1="1=0,10000, 10=0,04200, 100=0,01690, 1000=0,00759, 2500=0,00659 (USD)", REACH SVHC=Unknown, RoHS=Yes, RoHS Compliant=Yes, Series=RC, Size Code=0805, Stock 1=7991149, Supplier 1=Digi-Key, Termination=SMD/SMT, Tolerance=1%, Voltage Rating (DC)=150V, Width=0.049inch
R2 R3 R4 R5 R6 R7 R8 R9 R10: library part RC0805FR-0722RL, "RES - 22R 1/8W 0805 1%", Case Code (Imperial)=0805, Case Code (Metric)=2012, Manufacturer=Yageo, Max Operating Temperature=155°C, Max Power Dissipation=125mW, Min Operating Temperature=-55°C, Package Quantity=1, Resistance Tolerance=1%, Resistor Type="Thick Film", Supplier Part Number 1=311-22.0CRCT-ND, Temperature Coefficient=100ppm/°C, Voltage Rating=150V, Case/Package=0805, Category="Chip SMD Resistors", ComponentLink1Description=https://datasheet.ciiva.com/11819/0900766b8106beab-11819837.pdf?src-supplier=RSComponents, ComponentLink1URL=https://datasheet.ciiva.com/11819/0900766b8106beab-11819837.pdf?src-supplier=RSComponents, ComponentLink2Description=https://datasheet.ciiva.com/46447/444164-46447574.pdf?src-supplier=Element14, ComponentLink2URL=https://datasheet.ciiva.com/46447/444164-46447574.pdf?src-supplier=Element14, ComponentLink3Description=https://datasheet.ciiva.com/2457/pyu-r-int-thick-7-2457045.pdf?src-supplier=Digi-Key, ComponentLink3URL=https://datasheet.ciiva.com/2457/pyu-r-int-thick-7-2457045.pdf?src-supplier=Digi-Key, ComponentLink4Description=https://datasheet.ciiva.com/2457/pyu-r-int-thick-7-2457046.pdf?src-supplier=Digi-Key, ComponentLink4URL=https://datasheet.ciiva.com/2457/pyu-r-int-thick-7-2457046.pdf?src-supplier=Digi-Key, ComponentLink5Description=https://datasheet.ciiva.com/2457/pyu-r-int-thick-7-2457044.pdf?src-supplier=Digi-Key, ComponentLink5URL=https://datasheet.ciiva.com/2457/pyu-r-int-thick-7-2457044.pdf?src-supplier=Digi-Key, ComponentLink6Description=https://datasheet.ciiva.com/12667/rc0805-12667371.pdf?src-supplier=Mouser, ComponentLink6URL=https://datasheet.ciiva.com/12667/rc0805-12667371.pdf?src-supplier=Mouser, Construction=Rectangular, Depth=1.25mm, Features="Moisture Resistant", Height=0.024inch, Lead Free="Lead Free", Length=0.079inch, Manufacturer Part Number=RC0805FR-0722RL, Military Standard=Not, Number of Terminations=2, Packaging="Tape and Reel", Power Rating=125mW, Pricing 1="1=0,10000, 10=0,04200, 100=0,01690, 1000=0,00759, 2500=0,00659 (USD)", REACH SVHC=Unknown, Resistance=22R, RoHS=Yes, RoHS Compliant=Yes, Series=RC, Stock 1=534010, Supplier 1=Digi-Key, Technology="THICK FILM", Termination=SMD/SMT, Tolerance=1%, Width=0.049inch, Working Voltage=150V
R11 R12 R26 R37: library part CRCW08054K70FKEA, "RES - 4.7K 1/8W 0805 1%", Case Code (Imperial)=0805, Case Code (Metric)=2012, Manufacturer=Vishay, Max Operating Temperature=155°C, Max Power Dissipation=125mW, Min Operating Temperature=-55°C, Package Quantity=10, Resistance=4.7kR, Resistance Tolerance=1%, Resistor Type="Thick Film", Supplier Part Number 1=6791496P, Temperature Coefficient=100ppm/°C, Voltage Rating=150V, Case/Package=0805, Category="Chip SMD Resistors", ComponentLink1Description=https://datasheet.ciiva.com/11808/0900766b80d98b26-11808992.pdf?src-supplier=RSComponents, ComponentLink1URL=https://datasheet.ciiva.com/11808/0900766b80d98b26-11808992.pdf?src-supplier=RSComponents, ComponentLink2Description=https://datasheet.ciiva.com/2467/dcrcwe3-2467437.pdf?src-supplier=Digi-Key, ComponentLink2URL=https://datasheet.ciiva.com/2467/dcrcwe3-2467437.pdf?src-supplier=Digi-Key, ComponentLink3Description=https://datasheet.ciiva.com/2467/dcrcwe3-2467438.pdf?src-supplier=Digi-Key, ComponentLink3URL=https://datasheet.ciiva.com/2467/dcrcwe3-2467438.pdf?src-supplier=Digi-Key, ComponentLink4Description=https://datasheet.ciiva.com/2467/dcrcwe3-2467439.pdf?src-supplier=Digi-Key, ComponentLink4URL=https://datasheet.ciiva.com/2467/dcrcwe3-2467439.pdf?src-supplier=Digi-Key, ComponentLink5Description=https://datasheet.ciiva.com/5550/dcrcwe3-109170-5550903.pdf?src-supplier=Mouser, ComponentLink5URL=https://datasheet.ciiva.com/5550/dcrcwe3-109170-5550903.pdf?src-supplier=Mouser, ComponentLink6Description=https://datasheet.ciiva.com/9071/dcrcwe3-9071196.pdf?src-supplier=Avnet, ComponentLink6URL=https://datasheet.ciiva.com/9071/dcrcwe3-9071196.pdf?src-supplier=Avnet, ComponentLink7Description=https://datasheet.ciiva.com/26317/fld-crcw-e3-data-en-26317145.pdf?src-supplier=Distrelec, ComponentLink7URL=https://datasheet.ciiva.com/26317/fld-crcw-e3-data-en-26317145.pdf?src-supplier=Distrelec, ComponentLink8Description=https://datasheet.ciiva.com/16213/dcrcwe3-16213733.pdf?src-supplier=Future+Electronics, ComponentLink8URL=https://datasheet.ciiva.com/16213/dcrcwe3-16213733.pdf?src-supplier=Future+Electronics, ComponentLink9Description=https://datasheet.ciiva.com/16720/70201119-16720438.pdf?src-supplier=Allied+Electronics, ComponentLink9URL=https://datasheet.ciiva.com/16720/70201119-16720438.pdf?src-supplier=Allied+Electronics, Construction=Rectangular, Contact Plating=Tin, Depth=1.25mm, Features="Automotive AEC-Q200", Height=0.45mm, Lead Free="Lead Free", Length=2mm, Manufacturer Part Number=CRCW08054K70FKEA, Military Standard=Not, Number of Terminations=2, Packaging="Tape and Reel", Power Rating=125mW, Pricing 1="50=0.07500, 250=0.06800, 500=0.05500, 750=0.04400, 1000=0.03700 (USD)", Radiation Hardening=No, REACH SVHC=Unknown, RoHS=Yes, RoHS Compliant=Yes, Series=CRCW, Size Code=0805, Stock 1=1, Supplier 1=RSComponents, Technology="THICK FILM", Termination=SMD/SMT, Tolerance=1%, Voltage Rating (DC)=150V, Weight=0.000194oz, Width=1.25mm
R13: library part ERJ-6GEYJ152V, "RES - 1.5K 1/8W 0805 5%", Case Code (Imperial)=0805, Case Code (Metric)=2012, Manufacturer=Panasonic, Max Operating Temperature=155°C, Max Power Dissipation=125mW, Min Operating Temperature=-55°C, Package Quantity=5000, Resistance=1.5kR, Resistance Tolerance=5%, Resistor Type="Thick Film", Supplier Part Number 1=P1.5KACT-ND, Temperature Coefficient=200ppm/°C, Voltage Rating=150V, Case/Package=0805, Category="Chip SMD Resistors", ComponentLink1Description=https://datasheet.ciiva.com/34303/1989691-34303649.pdf?src-supplier=Jameco, ComponentLink1URL=https://datasheet.ciiva.com/34303/1989691-34303649.pdf?src-supplier=Jameco, ComponentLink2Description=https://datasheet.ciiva.com/11821/0900766b80f806dd-11821558.pdf?src-supplier=RSComponents, ComponentLink2URL=https://datasheet.ciiva.com/11821/0900766b80f806dd-11821558.pdf?src-supplier=RSComponents, ComponentLink3Description=https://datasheet.ciiva.com/22758/1500035-22758236.pdf?src-supplier=Farnell, ComponentLink3URL=https://datasheet.ciiva.com/22758/1500035-22758236.pdf?src-supplier=Farnell, ComponentLink4Description=https://datasheet.ciiva.com/43460/1500035-43460111.pdf?src-supplier=Farnell, ComponentLink4URL=https://datasheet.ciiva.com/43460/1500035-43460111.pdf?src-supplier=Farnell, ComponentLink5Description=https://datasheet.ciiva.com/16513/aoa0000ce1-16513737.pdf?src-supplier=Avnet+Asia, ComponentLink5URL=https://datasheet.ciiva.com/16513/aoa0000ce1-16513737.pdf?src-supplier=Avnet+Asia, ComponentLink6Description=https://datasheet.ciiva.com/17214/aoa0000ce1-17214765.pdf?src-supplier=Avnet+Europe, ComponentLink6URL=https://datasheet.ciiva.com/17214/aoa0000ce1-17214765.pdf?src-supplier=Avnet+Europe, ComponentLink7Description=https://datasheet.ciiva.com/46380/1500035-46380938.pdf?src-supplier=Element14, ComponentLink7URL=https://datasheet.ciiva.com/46380/1500035-46380938.pdf?src-supplier=Element14, ComponentLink8Description=https://datasheet.ciiva.com/46389/1500035-46389822.pdf?src-supplier=Element14, ComponentLink8URL=https://datasheet.ciiva.com/46389/1500035-46389822.pdf?src-supplier=Element14, ComponentLink9Description=https://datasheet.ciiva.com/28514/1678796-28514239.pdf?src-supplier=Element14, ComponentLink9URL=https://datasheet.ciiva.com/28514/1678796-28514239.pdf?src-supplier=Element14, ComponentLink10Description=https://datasheet.ciiva.com/30181/4aoa0000ce1-30181306.pdf?src-supplier=Onlinecomponents.com, ComponentLink10URL=https://datasheet.ciiva.com/30181/4aoa0000ce1-30181306.pdf?src-supplier=Onlinecomponents.com, ComponentLink11Description=https://datasheet.ciiva.com/16768/70255313-16768838.pdf?src-supplier=Allied+Electronics, ComponentLink11URL=https://datasheet.ciiva.com/16768/70255313-16768838.pdf?src-supplier=Allied+Electronics, ComponentLink12Description=https://datasheet.ciiva.com/16764/70255313-16764710.pdf?src-supplier=Allied+Electronics, ComponentLink12URL=https://datasheet.ciiva.com/16764/70255313-16764710.pdf?src-supplier=Allied+Electronics, Construction=Rectangular, Contact Plating=Tin, Depth=1.25mm, Height=0.6mm, Lead Free="Lead Free", Length=2mm, Manufacturer Part Number=ERJ-6GEYJ152V, Military Standard=Not, Mount="Surface Mount", Number of Terminations=2, Packaging="Tape and Reel", Power Rating=125mW, Pricing 1="1=0.10000, 10=0.05700, 100=0.02310, 1000=0.01036, 2500=0.00899 (USD)", Radiation Hardening=No, REACH SVHC="No SVHC", RoHS=Yes, RoHS Compliant=Yes, Series=ERJ, Stock 1=100295, Supplier 1=Digi-Key, Technology="THICK FILM", Termination=SMD/SMT, Tolerance=5%, Voltage Rating (DC)=150V, Width=0.049inch
R14 R17 R30 R31 R34 R41: library part RC0805FR-0710KL, "RES - 10K  1/8W 0805 1%", Case Code (Imperial)=0805, Case Code (Metric)=2012, Manufacturer=Yageo, Max Operating Temperature=155°C, Max Power Dissipation=125mW, Min Operating Temperature=-55°C, Package Quantity=1, Resistance=10kR, Resistance Tolerance=1%, Resistor Type="Thick Film", Supplier Part Number 1=311-10.0KCRCT-ND, Temperature Coefficient=100ppm/°C, Voltage Rating=150V, Case/Package=0805, Category="Chip SMD Resistors", ComponentLink1Description=https://datasheet.ciiva.com/11808/0900766b8106beab-11808151.pdf?src-supplier=RSComponents, ComponentLink1URL=https://datasheet.ciiva.com/11808/0900766b8106beab-11808151.pdf?src-supplier=RSComponents, ComponentLink2Description=https://datasheet.ciiva.com/12669/rc0805-12669688.pdf?src-supplier=Mouser, ComponentLink2URL=https://datasheet.ciiva.com/12669/rc0805-12669688.pdf?src-supplier=Mouser, ComponentLink3Description=https://datasheet.ciiva.com/2456/pyu-r-int-thick-7-2456974.pdf?src-supplier=Digi-Key, ComponentLink3URL=https://datasheet.ciiva.com/2456/pyu-r-int-thick-7-2456974.pdf?src-supplier=Digi-Key, ComponentLink4Description=https://datasheet.ciiva.com/2456/pyu-r-int-thick-7-2456972.pdf?src-supplier=Digi-Key, ComponentLink4URL=https://datasheet.ciiva.com/2456/pyu-r-int-thick-7-2456972.pdf?src-supplier=Digi-Key, ComponentLink5Description=https://datasheet.ciiva.com/2456/pyu-r-int-thick-7-2456973.pdf?src-supplier=Digi-Key, ComponentLink5URL=https://datasheet.ciiva.com/2456/pyu-r-int-thick-7-2456973.pdf?src-supplier=Digi-Key, ComponentLink6Description=https://datasheet.ciiva.com/16747/rc0805-16747087.pdf?src-supplier=Future+Electronics, ComponentLink6URL=https://datasheet.ciiva.com/16747/rc0805-16747087.pdf?src-supplier=Future+Electronics, ComponentLink7Description=https://datasheet.ciiva.com/46447/444164-46447563.pdf?src-supplier=Element14, ComponentLink7URL=https://datasheet.ciiva.com/46447/444164-46447563.pdf?src-supplier=Element14, Construction=Rectangular, Depth=1.25mm, Features="Moisture Resistant", Height=0.024inch, Lead Free="Lead Free", Length=2mm, Manufacturer Part Number=RC0805FR-0710KL, Military Standard=Not, Number of Terminations=2, Packaging="Tape and Reel", Power Rating=125mW, Pricing 1="1=0,10000, 10=0,04200, 100=0,01690, 1000=0,00759, 2500=0,00659 (USD)", REACH SVHC=Unknown, RoHS=Yes, RoHS Compliant=Yes, Series=RC, Size Code=0805, Stock 1=5866675, Supplier 1=Digi-Key, Technology="THICK FILM", Termination=SMD/SMT, Tolerance=1%, Width=0.049inch
R15 R40: library part RMCF0805JT120R, "RES - 120R 1/8W 0805 5%", Case Code (Imperial)=0805, Case Code (Metric)=2012, Manufacturer="Stackpole Electronics", Max Operating Temperature=155°C, Max Power Dissipation=125mW, Min Operating Temperature=-55°C, Resistor Type="Thick Film", Supplier Part Number 1=RMCF0805JT120RCT-ND, Temperature Coefficient=200ppm/°C, Tolerance=5%, Case/Package=0805, Category="Chip SMD Resistors", ComponentLink1Description=https://datasheet.ciiva.com/15193/getdatasheetpartid-409758-15193629.pdf?src-supplier=Verical, ComponentLink1URL=https://datasheet.ciiva.com/15193/getdatasheetpartid-409758-15193629.pdf?src-supplier=Verical, Construction=Rectangular, Contact Plating=Tin,Matte, Depth=1.25mm, Features="Automotive AEC-Q200", Height=0.026inch, Lead Free="Lead Free", Length=0.079inch, Manufacturer Part Number=RMCF0805JT120R, Military Standard=Not, Mount="Surface Mount", Number of Terminations=2, Packaging="Tape and Reel", Pricing 1="1=0.10000, 10=0.02000, 100=0.00810, 1000=0.00366, 2500=0.00318 (USD)", Radiation Hardening=No, Resistance=120R, RoHS=Yes, RoHS Compliant=Yes, Series=RMCF, Stock 1=223393, Supplier 1=Digi-Key, Width=0.049inch
R16: library part ERJ-6GEYJ181V, "RES - 180R 1/8W 0805 5%", Case Code (Imperial)=0805, Case Code (Metric)=2012, Manufacturer=Panasonic, Max Operating Temperature=155°C, Max Power Dissipation=125mW, Min Operating Temperature=-55°C, Package Quantity=1, Resistance Tolerance=5%, Resistor Type="Thick Film", Supplier Part Number 1=P180ACT-ND, Temperature Coefficient=200ppm/°C, Voltage Rating=150V, Case/Package=0805, Category="Chip SMD Resistors", ComponentLink1Description=https://datasheet.ciiva.com/11821/0900766b80f806dd-11821549.pdf?src-supplier=RSComponents, ComponentLink1URL=https://datasheet.ciiva.com/11821/0900766b80f806dd-11821549.pdf?src-supplier=RSComponents, ComponentLink2Description=https://datasheet.ciiva.com/46386/1500035-46386364.pdf?src-supplier=Element14, ComponentLink2URL=https://datasheet.ciiva.com/46386/1500035-46386364.pdf?src-supplier=Element14, ComponentLink3Description=https://datasheet.ciiva.com/5860/1500035-5860701.pdf?src-supplier=Farnell, ComponentLink3URL=https://datasheet.ciiva.com/5860/1500035-5860701.pdf?src-supplier=Farnell, ComponentLink4Description=https://datasheet.ciiva.com/46373/1500035-46373964.pdf?src-supplier=Element14, ComponentLink4URL=https://datasheet.ciiva.com/46373/1500035-46373964.pdf?src-supplier=Element14, ComponentLink5Description=https://datasheet.ciiva.com/28546/1678796-28546149.pdf?src-supplier=Element14, ComponentLink5URL=https://datasheet.ciiva.com/28546/1678796-28546149.pdf?src-supplier=Element14, ComponentLink6Description=https://datasheet.ciiva.com/24124/aoa0000ce1-37422-24124213.pdf?src-supplier=Mouser, ComponentLink6URL=https://datasheet.ciiva.com/24124/aoa0000ce1-37422-24124213.pdf?src-supplier=Mouser, ComponentLink7Description=https://datasheet.ciiva.com/16787/70255313-16787531.pdf?src-supplier=Allied+Electronics, ComponentLink7URL=https://datasheet.ciiva.com/16787/70255313-16787531.pdf?src-supplier=Allied+Electronics, ComponentLink8Description=https://datasheet.ciiva.com/16782/70255313-16782252.pdf?src-supplier=Allied+Electronics, ComponentLink8URL=https://datasheet.ciiva.com/16782/70255313-16782252.pdf?src-supplier=Allied+Electronics, ComponentLink9Description=https://datasheet.ciiva.com/9184/aoa0000ce1-9184891.pdf?src-supplier=Avnet, ComponentLink9URL=https://datasheet.ciiva.com/9184/aoa0000ce1-9184891.pdf?src-supplier=Avnet, ComponentLink10Description=https://datasheet.ciiva.com/30073/4aoa0000ce1-30073221.pdf?src-supplier=Onlinecomponents.com, ComponentLink10URL=https://datasheet.ciiva.com/30073/4aoa0000ce1-30073221.pdf?src-supplier=Onlinecomponents.com, ComponentLink11Description=https://datasheet.ciiva.com/17207/aoa0000ce1-17207135.pdf?src-supplier=Avnet+Europe, ComponentLink11URL=https://datasheet.ciiva.com/17207/aoa0000ce1-17207135.pdf?src-supplier=Avnet+Europe, Construction=Rectangular, Contact Plating=Tin, Depth=1.25mm, Features="Automotive AEC-Q200", Height=0.6mm, Lead Free="Lead Free", Length=2mm, Manufacturer Part Number=ERJ-6GEYJ181V, Military Standard=Not, Mount="Surface Mount", Number of Terminations=2, Packaging="Tape and Reel", Power Rating=125mW, Pricing 1="1=0,10000, 10=0,06800, 100=0,02780, 1000=0,01246, 2500=0,01082 (USD)", Radiation Hardening=No, REACH SVHC="No SVHC", Resistance=180R, RoHS=Yes, RoHS Compliant=Yes, Series=ERJ, Stock 1=83932, Supplier 1=Digi-Key, Technology="THICK FILM", Termination=SMD/SMT, Tolerance=5%, Voltage Rating (DC)=150V, Weight=0.000194oz, Width=0.049inch
R18 R19 R20: library part RMCF0805FT1M00, "RES - 1M 1/8W 0805 1%", Case Code (Imperial)=0805, Case Code (Metric)=2012, Manufacturer="Stackpole Electronics", Max Operating Temperature=155°C, Max Power Dissipation=125mW, Min Operating Temperature=-55°C, Resistance=1MR, Resistor Type="Thick Film", Supplier Part Number 1=RMCF0805FT1M00CT-ND, Temperature Coefficient=100ppm/°C, Tolerance=1%, Case/Package=0805, Category="Chip SMD Resistors", ComponentLink1Description=http://components.arrow.com/part/dataview/50575311S7171767N1174?src-supplier=Arrow+Electronics, ComponentLink1URL=http://components.arrow.com/part/dataview/50575311S7171767N1174?src-supplier=Arrow+Electronics, ComponentLink2Description=https://www.seielect.com/catalog/SEI-Packaging.pdf?src-supplier=Digi-Key, ComponentLink2URL=https://www.seielect.com/catalog/SEI-Packaging.pdf?src-supplier=Digi-Key, ComponentLink3Description=http://www.seielect.com/Catalog/SEI-rmc.pdf?src-supplier=Future+Electronics, ComponentLink3URL=http://www.seielect.com/Catalog/SEI-rmc.pdf?src-supplier=Future+Electronics, ComponentLink4Description=https://www.seielect.com/catalog/SEI-RMCF_RMCP.pdf?src-supplier=Avnet, ComponentLink4URL=https://www.seielect.com/catalog/SEI-RMCF_RMCP.pdf?src-supplier=Avnet, ComponentLink5Description=https://www.verical.com/server-webapp/html/getDatasheet?partID=366460&src-supplier=Verical, ComponentLink5URL=https://www.verical.com/server-webapp/html/getDatasheet?partID=366460&src-supplier=Verical, Construction=Rectangular, Contact Plating=Tin,Matte, Depth=1.25mm, Features="Automotive AEC-Q200", Height=0.026inch, Lead Free="Lead Free", Length=2mm, Manufacturer Part Number=RMCF0805FT1M00, Military Standard=Not, Mount="Surface Mount", Number of Terminations=2, Packaging="Tape and Reel", Power Rating=125mW, Pricing 1="1=0,10000, 10=0,02700, 100=0,01090, 1000=0,00488, 2500=0,00423 (USD)", Radiation Hardening=No, RoHS=Yes, RoHS Compliant=Yes, Series=RMCF, Size Code=0805, Stock 1=412220, Supplier 1=Digi-Key, Width=0.049inch